# Altium PCB PCB_STM32F411CEU6 BLUE-TOOTH_2023-03-25.pcbdoc (part 1 of 2)
Units mil, origin at the board's own origin, x right, y up, seen from the top; angles counter-clockwise.
Board outline 4590 x 3510 mil, 2 copper layers (Top Layer, Bottom Layer); 160 components, 126 nets, 614 pads, 625 vias.
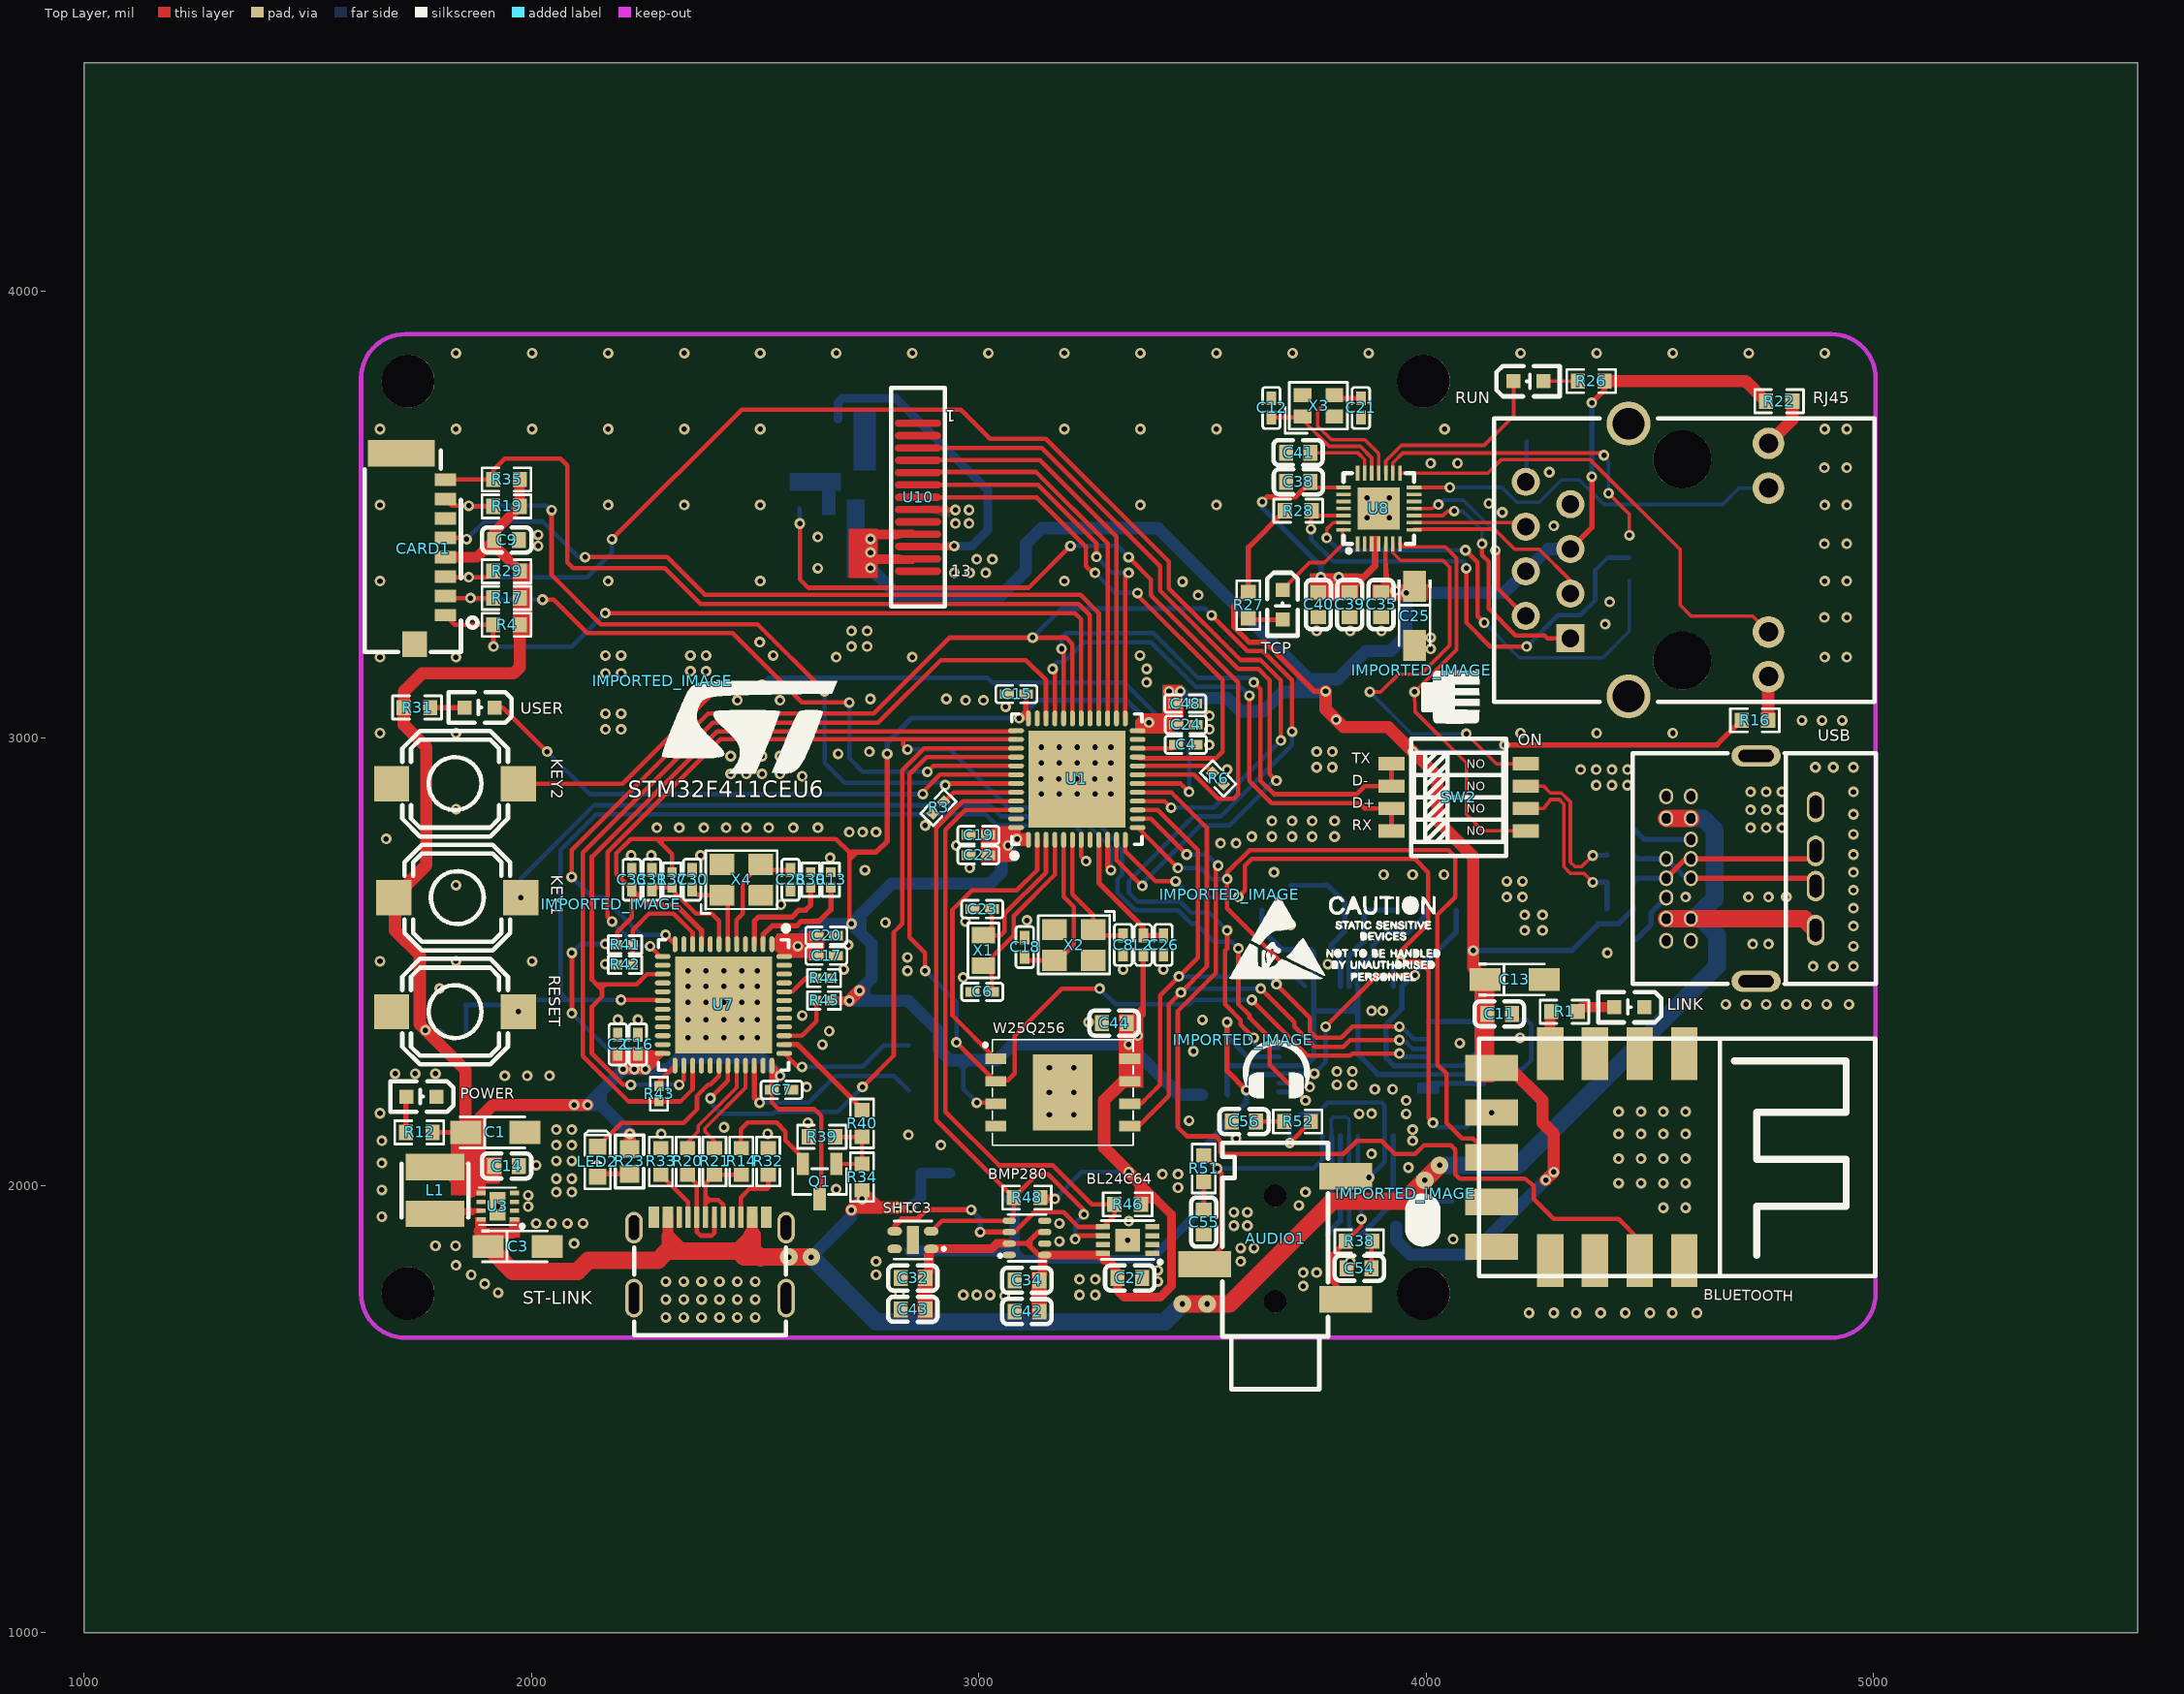
[diagram p0: Top Layer view]
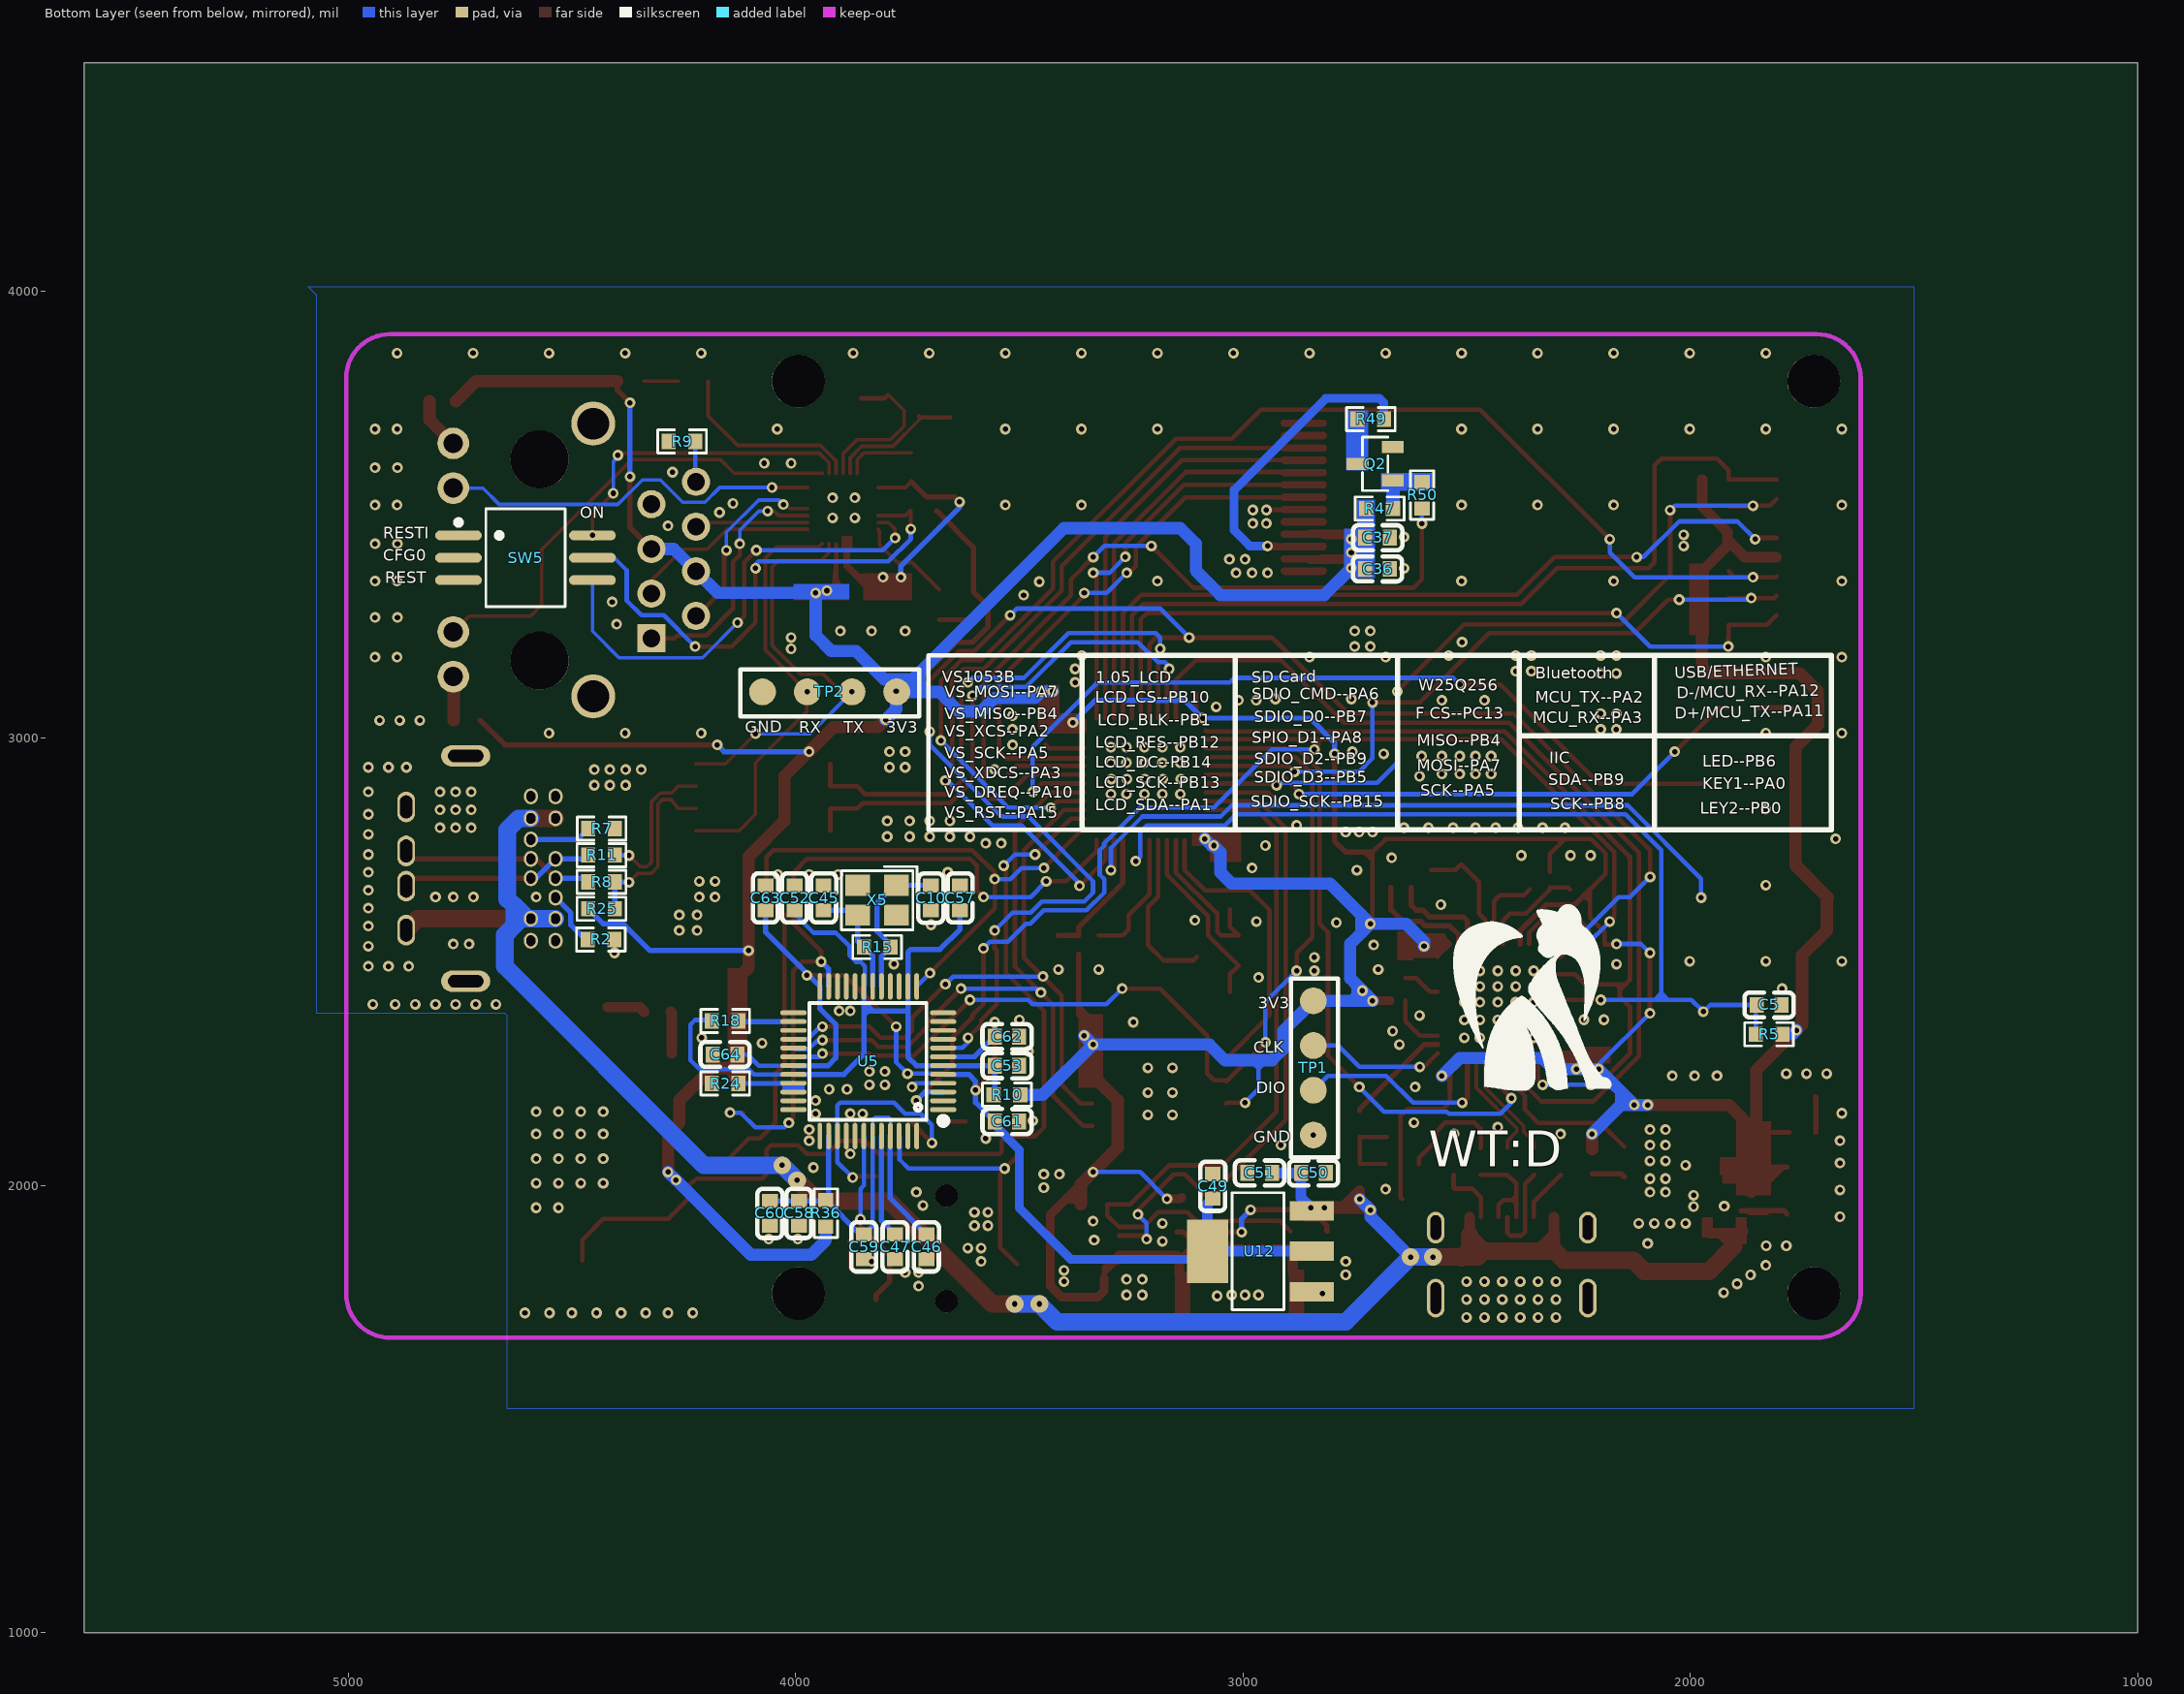
[diagram p1: Bottom Layer view, seen from below]

## Layer stack, top to bottom
Top Layer: signal copper (thickness not stored)
Dielectric: dielectric 12.6, FR-4, Dk 4.8
Bottom Layer: signal copper (thickness not stored)

## Board outline
5590,1000 1000,1000 1000,4510 5590,4510

## Components (designator, comment, footprint, x,y, rotation, side; value= is the part's Value field where it differs from the comment)
AUDIO1 "PJ-320B" AUDIO-SMD_PJ-320B 3662.41,1882.8 r180 top
BL24C64 "BL24C64A-NTRC" UDFN-8L_L2.0-W3.0-P0.50-BL-EP 3332.4,1877.81 r90 top
BLUETOOTH "易微联蓝牙ECBO2S3" 易微联蓝牙ECB02S3 4168.81,1863.6 r270 top
BMP280 "BMP280" SENSOR-TH_BMP280-BL 3107.41,1882.8 r0 top
C1 "22uF" CAP-SMD_L3.2-W1.6-R-RD 1918.81,2118.6 r180 top
C2 "10uF" C0402 2192.57,2315.48 r270 top
C3 "10uF" CAP-SMD_L3.2-W1.6-R-RD 1968.81,1863.6 r180 top
C4 "2.2uF" C0402 3462.57,2985.48 r180 top
C5 "100nF" C0603#1 1823.81,2403.6 r180 bottom
C6 "10pF" C0402 3007.41,2432.8 r180 top
C7 "100nF" C0402_NEW 2558.8,2213.6 r180 top
C8 "15pF" C0402 3322.41,2537.8 r90 top
C9 "100nF" C0603#2 1944.14,3443.6 r180 top
C10 "22pF" C0603#1 3697.41,2642.8 r270 bottom
C11 "100nF" C0603#2 4163.81,2383.6 r0 top
C12 "10pF" C0402 3653.8,3738.6 r270 top
C13 "1uF" CAP-SMD_L3.2-W1.6-R-RD 4197.56,2460.48 r180 top
C14 "100nF" C0603#2 1943.81,2043.6 r180 top
C15 "100nF" C0402_NEW 3083.8,3098.6 r0 top
C16 "100nF" C0402_NEW 2237.57,2315.48 r270 top
C17 "100nF" C0402_NEW 2658.8,2513.6 r180 top
C18 "15pF" C0402 3102.41,2532.8 r270 top
C19 "100nF" C0402_NEW 2998.8,2783.6 r0 top
C20 "100nF" C0402_NEW 2658.8,2558.6 r180 top
C21 "10pF" C0402 3853.8,3738.6 r90 top
C22 "100nF" C0402_NEW 2998.8,2738.6 r0 top
C23 "10pF" C0402 3007.41,2617.8 r180 top
C24 "100nF" C0402_NEW 3462.57,3030.48 r180 top
C25 "2.2uF" CAP-SMD_L3.2-W1.6-RD 3973.8,3273.6 r270 top
C26 "100nF" C0402_NEW 3412.41,2537.8 r270 top
C27 "100nF" C0603#2 3337.4,1792.81 r0 top
C28 "15pF" C0402 2578.8,2683.6 r90 top
C30 "15pF" C0402 2358.8,2683.6 r270 top
C31 "100nF" C0402_NEW 2268.8,2683.6 r270 top
C32 "100nF" C0603#2 2852.41,1792.8 r0 top
C33 "100nF" C0402_NEW 2223.8,2683.6 r270 top
C34 "100nF" C0603#2 3107.41,1787.8 r0 top
C35 "100nF" C0603#2 3898.8,3298.6 r270 top
C36 "4.7uF" C0603#1 2698.8,3378.6 r0 bottom
C37 "100nF" C0603#1 2698.8,3448.6 r180 bottom
C38 "100nF" C0603#2 3713.8,3573.6 r180 top
C39 "100nF" C0603#2 3828.8,3298.6 r270 top
C40 "100nF" C0603#2 3758.8,3298.6 r270 top
C41 "1uF" C0603#2 3713.8,3638.6 r0 top
C42 "10uF" C0603#2 3107.41,1717.8 r0 top
C43 "10uF" C0603#2 2852.41,1722.8 r0 top
C44 "100nF" C0603#2 3302.41,2362.8 r0 top
C45 "22pF" C0603#1 3937.41,2642.8 r90 bottom
C46 "100nF" C0603#1 3707.41,1862.8 r270 bottom
C47 "1uF" C0603#1 3777.41,1862.8 r270 bottom
C48 "10uF" C0402 3461.32,3077.36 r180 top
C49 "100nF" C0603#1 3067.41,1997.8 r90 bottom
C50 "10uF" C0603#1 2842.41,2027.8 r180 bottom
C51 "100nF" C0603#1 2962.41,2027.8 r0 bottom
C52 "100nF" C0603#1 4002.41,2642.8 r90 bottom
C53 "100nF" C0603#1 3527.41,2267.8 r180 bottom
C54 "10nF" C0603#2 3850,1815 r180 top
C55 "10nF" C0603#2 3502.41,1917.8 r270 top
C56 "10nF" C0603#2 3592.41,2142.8 r180 top
C57 "100nF" C0603#1 3632.41,2642.8 r90 bottom
C58 "100nF" C0603#1 3992.41,1937.8 r270 bottom
C59 "100nF" C0603#1 3847.41,1862.8 r270 bottom
C60 "100nF" C0603#1 4057.41,1937.8 r270 bottom
C61 "100nF" C0603#1 3527.41,2142.8 r180 bottom
C62 "100nF" C0603#1 3527.41,2332.8 r180 bottom
C63 "100nF" C0603#1 4067.41,2642.8 r90 bottom
C64 "100nF" C0603#1 4157.4,2292.8 r0 bottom
CARD1 "TF-021B-H265" TF-SMD_TF-021B-H265 1757.77,3423.6 r270 top
IMPORTED_IMAGE "IMPORTED_IMAGE" IMPORTED_IMAGE 2177.21,2628.69 r0 top
IMPORTED_IMAGE "IMPORTED_IMAGE" IMPORTED_IMAGE 3953.03,1981.86 r0 top
IMPORTED_IMAGE "IMPORTED_IMAGE" IMPORTED_IMAGE 3988.57,3151.21 r0 top
IMPORTED_IMAGE "IMPORTED_IMAGE" IMPORTED_IMAGE 2291.67,3128.16 r0 top
IMPORTED_IMAGE "IMPORTED_IMAGE" IMPORTED_IMAGE 3590,2324.9 r0 top
IMPORTED_IMAGE "IMPORTED_IMAGE" IMPORTED_IMAGE 3559.68,2649.62 r0 top
KEY1 "GT-TC129B-H043-L1" SW-SMD_L6.0-W6.0-P6.00-LS8.0 1833.82,2643.55 r180 top
KEY2 "GT-TC129B-H043-L1" SW-SMD_L6.0-W6.0-P6.00-LS8.0 1828.82,2898.55 r180 top
L1 "1uH" IND-SMD_L3.0-W3.0 1783.81,1988.6 r270 top
L2 "600Ω" L0402 3367.41,2537.8 r90 top
LED2 "LED-0603_R" LED0603_RED 2147.41,2052.8 r90 top
LINK "19-213/Y2C-CQ2R2L/3T(CY)" LED0603-R-RD 4453.81,2398.6 r180 top
POWER "19-213/Y2C-CQ2R2L/3T(CY)" LED0603-R-RD 1753.81,2198.6 r180 top
Q1 "SS8050_C2150" SOT-23-3_L2.9-W1.3-P1.90-LS2.4-BR#1 2643.8,2008.6 r90 top
Q2 "SS8050_C2150" SOT-23-3_L2.9-W1.3-P1.90-LS2.4-BR#2 2704.14,3613.6 r0 bottom
R1 "1K" R0603#1 4308.81,2388.6 r180 top
R2 "5.1K" R0603#2 4435,2550 r0 bottom
R3 "10K" R0402 2909.61,2845 r46 top
R4 "10kΩ" R0603#1 1943.81,3253.6 r180 top
R5 "10K" R0603#2 1823.61,2337.8 r180 bottom
R6 "10K" R0402 3534.61,2910 r315 top
R7 "5.1K" R0603#2 4433.6,2797.8 r180 bottom
R8 "22" R0603#2 4433.81,2678.6 r0 bottom
R9 "0Ω" R0603#2 4253.81,3663.6 r0 bottom
R10 "0Ω" R0603#2 3527.41,2202.8 r0 bottom
R11 "22" R0603#2 4433.81,2738.6 r0 bottom
R12 "1K" R0603#1 1748.81,2118.6 r0 top
R13 "10K" R0402 2668.8,2683.6 r90 top
R14 "1.5K" R0603#1 2468.8,2053.6 r270 top
R15 "1MΩ" R0603#2 3817.41,2532.8 r0 bottom
R16 "470Ω" R0603#1 4734.6,3040 r0 top
R17 "10kΩ" R0603#1 1943.81,3313.6 r180 top
R18 "100kΩ" R0603#2 4157.4,2367.8 r180 bottom
R19 "10kΩ" R0603#1 1943.81,3518.6 r0 top
R20 "22" R0603#1 2348.8,2053.6 r90 top
R21 "22" R0603#1 2408.8,2053.6 r90 top
R22 "470Ω" R0603#1 4788.81,3753.6 r0 top
R23 "1k" 0603 2218.8,2053.6 r270 top
R24 "100kΩ" R0603#2 4157.4,2227.8 r180 bottom
R25 "1.5K" R0603#2 4433.81,2618.6 r180 bottom
R26 "1K" R0603#1 4368.81,3798.6 r0 top
R27 "1K" R0603#1 3602.41,3297.8 r90 top
R28 "10kΩ" R0603#1 3713.8,3508.6 r0 top
R29 "10kΩ" R0603#1 1943.81,3373.6 r180 top
R30 "10K" R0402 2623.8,2683.6 r90 top
R31 "1K" R0603#1 1743.81,3068.6 r180 top
R32 "5.1K" R0603#1 2528.8,2053.6 r90 top
R33 "5.1K" R0603#1 2288.8,2053.6 r90 top
R34 "10K" R0603#1 2738.8,2018.6 r270 top
R35 "10kΩ" R0603#1 1943.81,3578.6 r0 top
R36 "10Ω" R0603#2 3932.41,1937.8 r90 bottom
R37 "100K" R0402 2313.8,2683.6 r90 top
R38 "20Ω" R0603#1 3850,1875 r0 top
R39 "36K" R0603#1 2648.8,2108.6 r0 top
R40 "100" R0603#1 2738.8,2138.6 r90 top
R41 "4.7K" R0402 2208.8,2538.6 r0 top
R42 "4.7K" R0402 2208.8,2493.6 r180 top
R43 "100" R0402 2284.61,2205 r270 top
R44 "10K" R0402 2653.8,2463.6 r180 top
R45 "4.7K" R0402 2653.8,2413.6 r180 top
R46 "4.7K" R0603#1 3332.39,1957.81 r180 top
R47 "10K" R0603#2 2694.14,3513.6 r180 bottom
R48 "4.7K" R0603#1 3107.41,1972.8 r180 top
R49 "10Ω" R0603#2 2714.14,3713.6 r0 bottom
R50 "1K" R0603#2 2599.14,3543.6 r270 bottom
R51 "20Ω" R0603#1 3502.41,2037.8 r270 top
R52 "20Ω" R0603#1 3712.41,2142.8 r180 top
RESET "GT-TC129B-H043-L1" SW-SMD_L6.0-W6.0-P6.00-LS8.0 1828.82,2388.55 r180 top
RJ45 "HR911105A_C12074" RJ45-TH_HR911105A 4493.81,3398.55 r90 top
RUN "19-213/Y2C-CQ2R2L/3T(CY)" LED0603-R-RD 4228.81,3798.6 r0 top
SHTC3 "SHTC3" SENSORM-SMD_4P-L2.0-W2.0-P1.00 2852.41,1877.8 r90 top
ST-LINK "GT-USB-7010B" USB-C-SMD_GT-USB-7010B 2398.79,1838.65 r0 top
SW2 "TP-04" SW-SMD_8P-L6.7-W5.4-P1.27-LS8.5 4072.41,2867.8 r270 top
SW5 "DSHP03TS-S" SW-SMD_DSHP03TS-S 4603.81,3403.6 r90 bottom
TCP "19-213/Y2C-CQ2R2L/3T(CY)" LED0603-R-RD 3678.8,3298.6 r270 top
TP1 "TP-SWD-2.54-4P" TP-2.54-4P 2842.41,2412.8 r90 bottom
TP2 "TP-SWD-2.54-4P" TP-2.54-4P 3773.8,3103.6 r180 bottom
U1 "STM32F411CEU6" UFQFPN-48_L7.0-W7.0-P0.50-BL-EP 3218.8,2908.6 r0 top
U3 "TPS62082DSGR" WSON-8_L2.0-W2.0-P0.50-TL-EP 1923.81,1953.6 r180 top
U5 "VS1053B" LQFP-48_L7.0-W7.0-P0.50-LS9.0-BL 3837.41,2277.8 r270 bottom
U7 "STM32F103CBU6" UFQFPN-48_L7.0-W7.0-P0.50-BL-EP 2428.8,2403.6 r180 top
U8 "CH9120" QFN-28_L4.0-W4.0-P0.40-TL-EP2.4 3893.8,3513.6 r90 top
U10 "LCD0.96" LCD0.96 2863.8,3373.6 r90 top
U12 "1117-1.8V" SOT-223-3_L6.5-W3.4-P2.30-LS7.0-BR 2962.41,1852.8 r0 bottom
USB "TYPE-C-31-M-10" USBC-TH_TYPE-C-31-M-10 4703.58,2708.6 r180 top
USER "19-213/Y2C-CQ2R2L/3T(CY)" LED0603-R-RD 1883.81,3068.6 r180 top
W25Q256 "W25Q256JVEIQ" WSON-8_L6.0-W8.0-P1.27-BL-EP 3187.36,2207.84 r270 top
X1 "32.768kHz" FC-12M_L2.0-W1.2 3009.91,2525.3 r270 top
X2 "8MHz" OSC-SMD_4P-L3.2-W2.5-BL 3212.41,2537.8 r180 top
X3 "-" OSC-SMD_4P-L2.0-W1.6-BL 3758.8,3743.6 r0 top
X4 "8MHz" OSC-SMD_4P-L3.2-W2.5-BL 2468.8,2683.6 r0 top
X5 "SX3B12.288F1210F30" CRYSTAL-SMD_4P-L3.2-W2.5-BL 3817.41,2637.8 r180 bottom

## Footprints (in the part's own frame and the unit in brackets; to place one, negate y for a bottom-side part, rotate by r counter-clockwise, add the part's x,y. Pads: shape width x height; smd on the part's side, far side on the other; paste and mask are expansions set on the pad)
0603 [mm]
  rect 1x1.1 smd: 1(-0.7,0) 2(0.7,0)
  silkscreen extent -1.5,-0.8 1.5,0.8
AUDIO-SMD_PJ-320B [mm]
  rect 3x1.5 smd: 1(-4,3.5) 2(4,1.5) 3(-4,-3.5)
  round 1.3 hole 1.3 unplated: ""(0,3.6) ""(0,-2.4)
  silkscreen extent -3,-5.4 3,8.6
C0402 [mm]
  rect 0.79x0.54 smd: 1(-0.545,0) 2(0.545,0)
  silkscreen extent -1.17,-0.5 1.17,0.5
C0402_NEW [mm]
  rect 0.79x0.54 smd: 1(-0.545,0) 2(0.545,0)
  silkscreen extent -1.17,-0.5 1.17,0.5
C0603#1 [mm]
  rect 0.8x0.9 smd: 1(0.7,0) 2(-0.7,0)
  silkscreen extent -1.39,-0.72 1.41,0.71
C0603#2 [mm]
  rect 0.8x0.9 smd: 1(-0.7,0) 2(0.7,0)
  silkscreen extent -1.41,-0.71 1.39,0.72
CAP-SMD_L3.2-W1.6-R-RD [mil]
  rect 69.19x51.02 smd: 1(66.39,0) 2(-66.39,0)
  silkscreen extent -66,-37 81,37
CAP-SMD_L3.2-W1.6-RD [mil]
  rect 69.19x51.02 smd: 1(-66.39,0) 2(66.39,0)
  silkscreen extent -81,-37 66,37
CRYSTAL-SMD_4P-L3.2-W2.5-BL [mm]
  rect 1.4x1.2 smd: 1(1.1,0.85) 2(-1.1,0.85) 3(-1.1,-0.85) 4(1.1,-0.85)
  silkscreen extent -2.03,-1.68 2.26,1.91
FC-12M_L2.0-W1.2 [mm]
  rect 0.925x1.3 smd: 1(-0.863,0) 2(0.863,0)
  silkscreen extent -1.55,-0.88 1.55,0.88
IMPORTED_IMAGE [mil]
IND-SMD_L3.0-W3.0 [mm]
  rect 1.5x3.32 smd: 1(1.328,0) 2(-1.328,0)
  silkscreen extent -1.52,-1.91 1.52,1.91
L0402 [mm]
  rect 0.79x0.54 smd: 1(-0.545,0) 2(0.545,0)
  silkscreen extent -1.17,-0.5 1.17,0.5
LCD0.96 [mm]
  round 0 smd: 1(8.4,0) 2(7.7,0) 3(7,0) 4(6.3,0) 5(5.6,0) 6(4.9,0) 7(4.2,0) 8(3.5,0) 9(2.8,0) 10(2.1,0) 11(1.4,0) 12(0.7,0) 13(0,0)
  Top Layer region: 0.2,1.1 0.2,-1.1 0.199,-1.12 0.196,-1.14 0.191,-1.16 0.184,-1.179 0.175,-1.197 0.164,-1.214 0.152,-1.23 0.138,-1.245 0.122,-1.258 0.106,-1.27 0.088,-1.28 0.069,-1.288 0.05,-1.294 0.03,-1.298 0.01,-1.3 -0.01,-1.3 -0.03,-1.298 -0.05,-1.294 -0.069,-1.288 -0.088,-1.28 -0.106,-1.27 -0.122,-1.258 -0.138,-1.245 -0.152,-1.23 -0.164,-1.214 -0.175,-1.197 -0.184,-1.179 -0.191,-1.16 -0.196,-1.14 -0.199,-1.12 -0.2,-1.1 -0.2,1.1 -0.199,1.12 -0.196,1.14 -0.191,1.16 -0.184,1.179 -0.175,1.197 -0.164,1.214 -0.152,1.23 -0.138,1.245 -0.122,1.258 -0.106,1.27 -0.088,1.28 -0.069,1.288 -0.05,1.294 -0.03,1.298 -0.01,1.3 0.01,1.3 0.03,1.298 0.05,1.294 0.069,1.288 0.088,1.28 0.106,1.27 0.122,1.258 0.138,1.245 0.152,1.23 0.164,1.214 0.175,1.197 0.184,1.179 0.191,1.16 0.196,1.14 0.199,1.12
  Top Layer region: 0.9,1.1 0.9,-1.1 0.899,-1.12 0.896,-1.14 0.891,-1.16 0.884,-1.179 0.875,-1.197 0.864,-1.214 0.852,-1.23 0.838,-1.245 0.822,-1.258 0.806,-1.27 0.788,-1.28 0.769,-1.288 0.75,-1.294 0.73,-1.298 0.71,-1.3 0.69,-1.3 0.67,-1.298 0.65,-1.294 0.631,-1.288 0.612,-1.28 0.594,-1.27 0.578,-1.258 0.562,-1.245 0.548,-1.23 0.536,-1.214 0.525,-1.197 0.516,-1.179 0.509,-1.16 0.504,-1.14 0.501,-1.12 0.5,-1.1 0.5,1.1 0.501,1.12 0.504,1.14 0.509,1.16 0.516,1.179 0.525,1.197 0.536,1.214 0.548,1.23 0.562,1.245 0.578,1.258 0.594,1.27 0.612,1.28 0.631,1.288 0.65,1.294 0.67,1.298 0.69,1.3 0.71,1.3 0.73,1.298 0.75,1.294 0.769,1.288 0.788,1.28 0.806,1.27 0.822,1.258 0.838,1.245 0.852,1.23 0.864,1.214 0.875,1.197 0.884,1.179 0.891,1.16 0.896,1.14 0.899,1.12
  Top Layer region: 1.6,1.1 1.6,-1.1 1.599,-1.12 1.596,-1.14 1.591,-1.16 1.584,-1.179 1.575,-1.197 1.564,-1.214 1.552,-1.23 1.538,-1.245 1.522,-1.258 1.506,-1.27 1.488,-1.28 1.469,-1.288 1.45,-1.294 1.43,-1.298 1.41,-1.3 1.39,-1.3 1.37,-1.298 1.35,-1.294 1.331,-1.288 1.312,-1.28 1.294,-1.27 1.278,-1.258 1.262,-1.245 1.248,-1.23 1.236,-1.214 1.225,-1.197 1.216,-1.179 1.209,-1.16 1.204,-1.14 1.201,-1.12 1.2,-1.1 1.2,1.1 1.201,1.12 1.204,1.14 1.209,1.16 1.216,1.179 1.225,1.197 1.236,1.214 1.248,1.23 1.262,1.245 1.278,1.258 1.294,1.27 1.312,1.28 1.331,1.288 1.35,1.294 1.37,1.298 1.39,1.3 1.41,1.3 1.43,1.298 1.45,1.294 1.469,1.288 1.488,1.28 1.506,1.27 1.522,1.258 1.538,1.245 1.552,1.23 1.564,1.214 1.575,1.197 1.584,1.179 1.591,1.16 1.596,1.14 1.599,1.12
  Top Layer region: 2.3,1.1 2.3,-1.1 2.299,-1.12 2.296,-1.14 2.291,-1.16 2.284,-1.179 2.275,-1.197 2.264,-1.214 2.252,-1.23 2.238,-1.245 2.222,-1.258 2.206,-1.27 2.188,-1.28 2.169,-1.288 2.15,-1.294 2.13,-1.298 2.11,-1.3 2.09,-1.3 2.07,-1.298 2.05,-1.294 2.031,-1.288 2.012,-1.28 1.994,-1.27 1.978,-1.258 1.962,-1.245 1.948,-1.23 1.936,-1.214 1.925,-1.197 1.916,-1.179 1.909,-1.16 1.904,-1.14 1.901,-1.12 1.9,-1.1 1.9,1.1 1.901,1.12 1.904,1.14 1.909,1.16 1.916,1.179 1.925,1.197 1.936,1.214 1.948,1.23 1.962,1.245 1.978,1.258 1.994,1.27 2.012,1.28 2.031,1.288 2.05,1.294 2.07,1.298 2.09,1.3 2.11,1.3 2.13,1.298 2.15,1.294 2.169,1.288 2.188,1.28 2.206,1.27 2.222,1.258 2.238,1.245 2.252,1.23 2.264,1.214 2.275,1.197 2.284,1.179 2.291,1.16 2.296,1.14 2.299,1.12
  Top Layer region: 3,1.1 3,-1.1 2.999,-1.12 2.996,-1.14 2.991,-1.16 2.984,-1.179 2.975,-1.197 2.964,-1.214 2.952,-1.23 2.938,-1.245 2.922,-1.258 2.906,-1.27 2.888,-1.28 2.869,-1.288 2.85,-1.294 2.83,-1.298 2.81,-1.3 2.79,-1.3 2.77,-1.298 2.75,-1.294 2.731,-1.288 2.712,-1.28 2.694,-1.27 2.678,-1.258 2.662,-1.245 2.648,-1.23 2.636,-1.214 2.625,-1.197 2.616,-1.179 2.609,-1.16 2.604,-1.14 2.601,-1.12 2.6,-1.1 2.6,1.1 2.601,1.12 2.604,1.14 2.609,1.16 2.616,1.179 2.625,1.197 2.636,1.214 2.648,1.23 2.662,1.245 2.678,1.258 2.694,1.27 2.712,1.28 2.731,1.288 2.75,1.294 2.77,1.298 2.79,1.3 2.81,1.3 2.83,1.298 2.85,1.294 2.869,1.288 2.888,1.28 2.906,1.27 2.922,1.258 2.938,1.245 2.952,1.23 2.964,1.214 2.975,1.197 2.984,1.179 2.991,1.16 2.996,1.14 2.999,1.12
  Top Layer region: 3.7,1.1 3.7,-1.1 3.699,-1.12 3.696,-1.14 3.691,-1.16 3.684,-1.179 3.675,-1.197 3.664,-1.214 3.652,-1.23 3.638,-1.245 3.622,-1.258 3.606,-1.27 3.588,-1.28 3.569,-1.288 3.55,-1.294 3.53,-1.298 3.51,-1.3 3.49,-1.3 3.47,-1.298 3.45,-1.294 3.431,-1.288 3.412,-1.28 3.394,-1.27 3.378,-1.258 3.362,-1.245 3.348,-1.23 3.336,-1.214 3.325,-1.197 3.316,-1.179 3.309,-1.16 3.304,-1.14 3.301,-1.12 3.3,-1.1 3.3,1.1 3.301,1.12 3.304,1.14 3.309,1.16 3.316,1.179 3.325,1.197 3.336,1.214 3.348,1.23 3.362,1.245 3.378,1.258 3.394,1.27 3.412,1.28 3.431,1.288 3.45,1.294 3.47,1.298 3.49,1.3 3.51,1.3 3.53,1.298 3.55,1.294 3.569,1.288 3.588,1.28 3.606,1.27 3.622,1.258 3.638,1.245 3.652,1.23 3.664,1.214 3.675,1.197 3.684,1.179 3.691,1.16 3.696,1.14 3.699,1.12
  Top Layer region: 4.4,1.1 4.4,-1.1 4.399,-1.12 4.396,-1.14 4.391,-1.16 4.384,-1.179 4.375,-1.197 4.364,-1.214 4.352,-1.23 4.338,-1.245 4.322,-1.258 4.306,-1.27 4.288,-1.28 4.269,-1.288 4.25,-1.294 4.23,-1.298 4.21,-1.3 4.19,-1.3 4.17,-1.298 4.15,-1.294 4.131,-1.288 4.112,-1.28 4.094,-1.27 4.078,-1.258 4.062,-1.245 4.048,-1.23 4.036,-1.214 4.025,-1.197 4.016,-1.179 4.009,-1.16 4.004,-1.14 4.001,-1.12 4,-1.1 4,1.1 4.001,1.12 4.004,1.14 4.009,1.16 4.016,1.179 4.025,1.197 4.036,1.214 4.048,1.23 4.062,1.245 4.078,1.258 4.094,1.27 4.112,1.28 4.131,1.288 4.15,1.294 4.17,1.298 4.19,1.3 4.21,1.3 4.23,1.298 4.25,1.294 4.269,1.288 4.288,1.28 4.306,1.27 4.322,1.258 4.338,1.245 4.352,1.23 4.364,1.214 4.375,1.197 4.384,1.179 4.391,1.16 4.396,1.14 4.399,1.12
  Top Layer region: 5.1,1.1 5.1,-1.1 5.099,-1.12 5.096,-1.14 5.091,-1.16 5.084,-1.179 5.075,-1.197 5.064,-1.214 5.052,-1.23 5.038,-1.245 5.022,-1.258 5.006,-1.27 4.988,-1.28 4.969,-1.288 4.95,-1.294 4.93,-1.298 4.91,-1.3 4.89,-1.3 4.87,-1.298 4.85,-1.294 4.831,-1.288 4.812,-1.28 4.794,-1.27 4.778,-1.258 4.762,-1.245 4.748,-1.23 4.736,-1.214 4.725,-1.197 4.716,-1.179 4.709,-1.16 4.704,-1.14 4.701,-1.12 4.7,-1.1 4.7,1.1 4.701,1.12 4.704,1.14 4.709,1.16 4.716,1.179 4.725,1.197 4.736,1.214 4.748,1.23 4.762,1.245 4.778,1.258 4.794,1.27 4.812,1.28 4.831,1.288 4.85,1.294 4.87,1.298 4.89,1.3 4.91,1.3 4.93,1.298 4.95,1.294 4.969,1.288 4.988,1.28 5.006,1.27 5.022,1.258 5.038,1.245 5.052,1.23 5.064,1.214 5.075,1.197 5.084,1.179 5.091,1.16 5.096,1.14 5.099,1.12
  Top Layer region: 5.8,1.1 5.8,-1.1 5.799,-1.12 5.796,-1.14 5.791,-1.16 5.784,-1.179 5.775,-1.197 5.764,-1.214 5.752,-1.23 5.738,-1.245 5.722,-1.258 5.706,-1.27 5.688,-1.28 5.669,-1.288 5.65,-1.294 5.63,-1.298 5.61,-1.3 5.59,-1.3 5.57,-1.298 5.55,-1.294 5.531,-1.288 5.512,-1.28 5.494,-1.27 5.478,-1.258 5.462,-1.245 5.448,-1.23 5.436,-1.214 5.425,-1.197 5.416,-1.179 5.409,-1.16 5.404,-1.14 5.401,-1.12 5.4,-1.1 5.4,1.1 5.401,1.12 5.404,1.14 5.409,1.16 5.416,1.179 5.425,1.197 5.436,1.214 5.448,1.23 5.462,1.245 5.478,1.258 5.494,1.27 5.512,1.28 5.531,1.288 5.55,1.294 5.57,1.298 5.59,1.3 5.61,1.3 5.63,1.298 5.65,1.294 5.669,1.288 5.688,1.28 5.706,1.27 5.722,1.258 5.738,1.245 5.752,1.23 5.764,1.214 5.775,1.197 5.784,1.179 5.791,1.16 5.796,1.14 5.799,1.12
  Top Layer region: 6.5,1.1 6.5,-1.1 6.499,-1.12 6.496,-1.14 6.491,-1.16 6.484,-1.179 6.475,-1.197 6.464,-1.214 6.452,-1.23 6.438,-1.245 6.422,-1.258 6.406,-1.27 6.388,-1.28 6.369,-1.288 6.35,-1.294 6.33,-1.298 6.31,-1.3 6.29,-1.3 6.27,-1.298 6.25,-1.294 6.231,-1.288 6.212,-1.28 6.194,-1.27 6.178,-1.258 6.162,-1.245 6.148,-1.23 6.136,-1.214 6.125,-1.197 6.116,-1.179 6.109,-1.16 6.104,-1.14 6.101,-1.12 6.1,-1.1 6.1,1.1 6.101,1.12 6.104,1.14 6.109,1.16 6.116,1.179 6.125,1.197 6.136,1.214 6.148,1.23 6.162,1.245 6.178,1.258 6.194,1.27 6.212,1.28 6.231,1.288 6.25,1.294 6.27,1.298 6.29,1.3 6.31,1.3 6.33,1.298 6.35,1.294 6.369,1.288 6.388,1.28 6.406,1.27 6.422,1.258 6.438,1.245 6.452,1.23 6.464,1.214 6.475,1.197 6.484,1.179 6.491,1.16 6.496,1.14 6.499,1.12
  Top Layer region: 8.6,1.1 8.6,-1.1 8.599,-1.12 8.596,-1.14 8.591,-1.16 8.584,-1.179 8.575,-1.197 8.564,-1.214 8.552,-1.23 8.538,-1.245 8.522,-1.258 8.506,-1.27 8.488,-1.28 8.469,-1.288 8.45,-1.294 8.43,-1.298 8.41,-1.3 8.39,-1.3 8.37,-1.298 8.35,-1.294 8.331,-1.288 8.312,-1.28 8.294,-1.27 8.278,-1.258 8.262,-1.245 8.248,-1.23 8.236,-1.214 8.225,-1.197 8.216,-1.179 8.209,-1.16 8.204,-1.14 8.201,-1.12 8.2,-1.1 8.2,1.1 8.201,1.12 8.204,1.14 8.209,1.16 8.216,1.179 8.225,1.197 8.236,1.214 8.248,1.23 8.262,1.245 8.278,1.258 8.294,1.27 8.312,1.28 8.331,1.288 8.35,1.294 8.37,1.298 8.39,1.3 8.41,1.3 8.43,1.298 8.45,1.294 8.469,1.288 8.488,1.28 8.506,1.27 8.522,1.258 8.538,1.245 8.552,1.23 8.564,1.214 8.575,1.197 8.584,1.179 8.591,1.16 8.596,1.14 8.599,1.12
  Top Layer region: 7.9,1.1 7.9,-1.1 7.899,-1.12 7.896,-1.14 7.891,-1.16 7.884,-1.179 7.875,-1.197 7.864,-1.214 7.852,-1.23 7.838,-1.245 7.822,-1.258 7.806,-1.27 7.788,-1.28 7.769,-1.288 7.75,-1.294 7.73,-1.298 7.71,-1.3 7.69,-1.3 7.67,-1.298 7.65,-1.294 7.631,-1.288 7.612,-1.28 7.594,-1.27 7.578,-1.258 7.562,-1.245 7.548,-1.23 7.536,-1.214 7.525,-1.197 7.516,-1.179 7.509,-1.16 7.504,-1.14 7.501,-1.12 7.5,-1.1 7.5,1.1 7.501,1.12 7.504,1.14 7.509,1.16 7.516,1.179 7.525,1.197 7.536,1.214 7.548,1.23 7.562,1.245 7.578,1.258 7.594,1.27 7.612,1.28 7.631,1.288 7.65,1.294 7.67,1.298 7.69,1.3 7.71,1.3 7.73,1.298 7.75,1.294 7.769,1.288 7.788,1.28 7.806,1.27 7.822,1.258 7.838,1.245 7.852,1.23 7.864,1.214 7.875,1.197 7.884,1.179 7.891,1.16 7.896,1.14 7.899,1.12
  Top Layer region: 7.2,1.1 7.2,-1.1 7.199,-1.12 7.196,-1.14 7.191,-1.16 7.184,-1.179 7.175,-1.197 7.164,-1.214 7.152,-1.23 7.138,-1.245 7.122,-1.258 7.106,-1.27 7.088,-1.28 7.069,-1.288 7.05,-1.294 7.03,-1.298 7.01,-1.3 6.99,-1.3 6.97,-1.298 6.95,-1.294 6.931,-1.288 6.912,-1.28 6.894,-1.27 6.878,-1.258 6.862,-1.245 6.848,-1.23 6.836,-1.214 6.825,-1.197 6.816,-1.179 6.809,-1.16 6.804,-1.14 6.801,-1.12 6.8,-1.1 6.8,1.1 6.801,1.12 6.804,1.14 6.809,1.16 6.816,1.179 6.825,1.197 6.836,1.214 6.848,1.23 6.862,1.245 6.878,1.258 6.894,1.27 6.912,1.28 6.931,1.288 6.95,1.294 6.97,1.298 6.99,1.3 7.01,1.3 7.03,1.298 7.05,1.294 7.069,1.288 7.088,1.28 7.106,1.27 7.122,1.258 7.138,1.245 7.152,1.23 7.164,1.214 7.175,1.197 7.184,1.179 7.191,1.16 7.196,1.14 7.199,1.12
  silkscreen extent -2,-1.52 10.41,1.52
LED0603-R-RD [mm]
  rect 0.8x0.8 smd: 1(0.851,0) 2(-0.851,0)
  silkscreen extent -1.82,-0.86 1.77,0.86
LED0603_RED [mm]
  rect 0.9x1 smd: 1(-0.85,0) 2(0.85,0)
  silkscreen extent -1.54,-0.73 1.75,0.73
LQFP-48_L7.0-W7.0-P0.50-LS9.0-BL [mm]
  oval 0.27x1.5 smd: 1(2.75,4.25) 2(2.25,4.25) 3(1.75,4.25) 4(1.25,4.25) 5(0.75,4.25) 6(0.25,4.25) 7(-0.25,4.25) 8(-0.75,4.25) 9(-1.25,4.25) 10(-1.75,4.25) 11(-2.25,4.25) 12(-2.75,4.25) 25(-2.75,-4.25) 26(-2.25,-4.25) 27(-1.75,-4.25) 28(-1.25,-4.25) 29(-0.75,-4.25) 30(-0.25,-4.25) 31(0.25,-4.25) 32(0.75,-4.25) 33(1.25,-4.25) 34(1.75,-4.25) 35(2.25,-4.25) 36(2.75,-4.25)
  oval 1.5x0.27 smd: 13(-4.25,2.75) 14(-4.25,2.25) 15(-4.25,1.75) 16(-4.25,1.25) 17(-4.25,0.75) 18(-4.25,0.25) 19(-4.25,-0.25) 20(-4.25,-0.75) 21(-4.25,-1.25) 22(-4.25,-1.75) 23(-4.25,-2.25) 24(-4.25,-2.75) 37(4.25,-2.75) 38(4.25,-2.25) 39(4.25,-1.75) 40(4.25,-1.25) 41(4.25,-0.75) 42(4.25,-0.25) 43(4.25,0.25) 44(4.25,0.75) 45(4.25,1.25) 46(4.25,1.75) 47(4.25,2.25) 48(4.25,2.75)
  silkscreen extent -3.3,-3.34 3.59,4.46
OSC-SMD_4P-L2.0-W1.6-BL [mm]
  rect 1x0.8 smd: 1(-0.9,-0.6) 2(0.9,-0.6) 3(0.9,0.6) 4(-0.9,0.6)
  silkscreen extent -1.89,-1.56 1.65,1.33
OSC-SMD_4P-L3.2-W2.5-BL [mm]
  rect 1.4x1.2 smd: 1(-1.1,-0.875) 2(1.1,-0.875) 3(1.1,0.875) 4(-1.1,0.875)
  silkscreen extent -2.29,-1.9 2.03,1.65
QFN-28_L4.0-W4.0-P0.40-TL-EP2.4 [mm]
  rect 0.85x0.2 smd: 1(-2,1.2) 2(-2,0.8) 3(-2,0.4) 4(-2,0.001) 5(-2,-0.4) 6(-2,-0.8) 7(-2,-1.2) 15(2,-1.2) 16(2,-0.8) 17(2,-0.4) 18(2,0) 19(2,0.4) 20(2,0.8) 21(2,1.2)
  rect 0.2x0.85 smd: 8(-1.2,-2) 9(-0.8,-2) 10(-0.4,-2) 11(0,-2) 12(0.399,-2) 13(0.8,-2) 14(1.2,-2) 22(1.2,2) 23(0.8,2) 24(0.4,2) 25(0,2) 26(-0.4,2) 27(-0.8,2) 28(-1.2,2)
  rect 2.4x2.4 smd: 29(0,0)
  silkscreen extent -2.5,-2 2,2
R0402 [mm]
  rect 0.566x0.54 smd: 1(-0.433,0) 2(0.433,0)
  silkscreen extent -0.94,-0.5 0.94,0.5
R0603#1 [mil]
  rect 31.75x34.02 smd: 1(-29.65,0) 2(29.66,0)
  silkscreen extent -55,-26 55,26
R0603#2 [mil]
  rect 31.75x34.02 smd: 1(29.65,0) 2(-29.65,0)
  silkscreen extent -55,-26 55,26
RJ45-TH_HR911105A [mm]
  rect 1.6x1.6 hole 1: 1(-4.45,4.355)
  round 1.6 hole 1: 2(-3.18,6.895) 3(-1.91,4.355) 4(-0.64,6.895) 5(0.63,4.355) 6(1.9,6.895) 7(3.17,4.355) 8(4.44,6.895)
  round 1.8 hole 1.1: 9(-6.625,-6.895) 10(-4.085,-6.895) 11(4.085,-6.895) 12(6.625,-6.895)
  round 2.5 hole 1.8: SH1(-7.745,1.055) SH2(7.745,1.055)
  round 3.3 hole 3.3 unplated: ""(-5.715,-1.995) ""(5.715,-1.995)
  silkscreen extent -8.05,-12.92 8.05,8.68
SENSOR-TH_BMP280-BL [mm]
  oval 0.767x0.364 smd: 1(-1.008,-0.975) 2(-1.008,-0.325) 3(-1.008,0.325) 4(-1.008,0.975) 5(1.009,0.975) 6(1.009,0.325) 7(1.009,-0.325) 8(1.009,-0.975)
  silkscreen extent -1.61,-1.33 1.08,1.33
SENSORM-SMD_4P-L2.0-W2.0-P1.00 [mm]
  oval 0.49x0.83 smd: 1(-0.5,-1.04) 2(0.5,-1.04) 3(0.5,1.04) 4(-0.5,1.04)
  rect 1.6x0.7 smd: 5(0,0)
  silkscreen extent -1.08,-1.84 1.08,1.08
SOT-23-3_L2.9-W1.3-P1.90-LS2.4-BR#1 [mm]
  rect 1.25x0.7 smd: 1(1,-0.95) 2(1,0.95) 3(-1,0)
  silkscreen extent -0.73,-1.53 0.73,1.53
SOT-23-3_L2.9-W1.3-P1.90-LS2.4-BR#2 [mm]
  rect 1.25x0.7 smd: 1(-1,0.95) 2(-1,-0.95) 3(1,0)
  silkscreen extent -0.73,-1.53 0.73,1.53
SOT-223-3_L6.5-W3.4-P2.30-LS7.0-BR [mm]
  rect 2.5x1.1 smd: 1(-2.97,2.3) 2(-2.97,0) 3(-2.97,-2.3)
  rect 2.34x3.6 smd: 4(2.97,0)
  silkscreen extent -1.37,-3.33 1.57,3.33
SW-SMD_8P-L6.7-W5.4-P1.27-LS8.5 [mil]
  rect 30x59.05 smd: 1(-75,-150) 2(-25,-150) 3(25,-150) 4(75,-150) 5(75,150) 6(25,150) 7(-25,150) 8(-75,150)
  silkscreen extent -131,-106 131,106
SW-SMD_DSHP03TS-S [mm]
  oval 0.56x2.655 smd: 1(1.27,3.802) 2(0,3.802) 3(-1.27,3.802) 4(-1.27,-3.803) 5(0,-3.803) 6(1.27,-3.803)
  silkscreen extent -2.78,-2.25 2.78,3.95
SW-SMD_L6.0-W6.0-P6.00-LS8.0 [mm]
  rect 2x2 smd: 1(-3.601,0) 2(3.601,0)
  silkscreen extent -3,-3 3,3
TF-SMD_TF-021B-H265 [mm]
  rect 0.7x1.2 smd: 1(3.775,1.25) 2(2.675,1.25) 3(1.575,1.25) 4(0.475,1.25) 5(-0.625,1.25) 6(-1.725,1.25) 7(-2.825,1.25) 8(-3.925,1.25)
  rect 1.5x3.8 smd: 9(-5.425,-1.25)
  rect 1.45x1.4 smd: 10(5.425,-0.5)
  silkscreen extent -5.58,-3.32 5.85,3.08
TP-2.54-4P [mil]
  round 60 smd: 1(0,0) 2(-100,0) 3(-200,0) 4(-300,0)
  silkscreen extent -350,-55 50,50
UDFN-8L_L2.0-W3.0-P0.50-BL-EP [mm]
  rect 0.3x0.8 smd: 1(-0.75,-1.4) 2(-0.25,-1.4) 3(0.25,-1.4) 4(0.75,-1.4) 5(0.75,1.4) 6(0.25,1.4) 7(-0.25,1.4) 8(-0.75,1.4)
  rect 1.3x1.4 smd: 9(0,0)
  silkscreen extent -1.35,-1.95 1.1,1.5
UFQFPN-48_L7.0-W7.0-P0.50-BL-EP [mm]
  oval 0.28x0.9 smd: 1(-2.751,-3.449) 2(-2.25,-3.449) 3(-1.75,-3.449) 4(-1.25,-3.449) 5(-0.749,-3.449) 6(-0.249,-3.449) 7(0.249,-3.449) 8(0.749,-3.449) 9(1.25,-3.449) 10(1.75,-3.449) 11(2.251,-3.449) 12(2.751,-3.449) 25(2.751,3.449) 26(2.251,3.449) 27(1.75,3.449) 28(1.25,3.449) 29(0.749,3.449) 30(0.249,3.449) 31(-0.249,3.449) 32(-0.749,3.449) 33(-1.25,3.449) 34(-1.75,3.449) 35(-2.25,3.449) 36(-2.751,3.449)
  oval 0.9x0.28 smd: 13(3.449,-2.751) 14(3.449,-2.25) 15(3.449,-1.75) 16(3.449,-1.25) 17(3.449,-0.749) 18(3.449,-0.249) 19(3.449,0.249) 20(3.449,0.749) 21(3.449,1.25) 22(3.449,1.75) 23(3.449,2.25) 24(3.449,2.751) 37(-3.449,2.751) 38(-3.449,2.25) 39(-3.449,1.75) 40(-3.449,1.25) 41(-3.449,0.749) 42(-3.449,0.249) 43(-3.449,-0.249) 44(-3.449,-0.749) 45(-3.449,-1.25) 46(-3.449,-1.75) 47(-3.449,-2.25) 48(-3.449,-2.751)
  rect 5.5x5.5 smd: 49(0,0)
  silkscreen extent -3.7,-4.5 3.7,3.7
USB-C-SMD_GT-USB-7010B [mm]
  rect 0.6x1.2 smd: 1(-3.2,2.3) 2(-2.4,2.3) 11(2.4,2.3) 12(3.2,2.3)
  rect 0.3x1.2 smd: 3(-1.75,2.3) 4(-1.25,2.3) 5(-0.75,2.3) 6(-0.25,2.3) 7(0.25,2.3) 8(0.75,2.3) 9(1.25,2.3) 10(1.75,2.3)
  oval 1x1.8 hole 0.6 slot 1.4 at 90 deg: 13(-4.32,1.7) 14(4.32,1.7)
  oval 1x2.2 hole 0.6 slot 1.8 at 90 deg: 15(-4.32,-2.3) 16(4.32,-2.3)
  silkscreen extent -4.3,-4.4 4.3,0.57
USBC-TH_TYPE-C-31-M-10 [mm]
  oval 0.8x0.9 hole 0.5 slot 0.6 at 90 deg: 1(4.24,4.1) 2(4.24,2.85) 3(4.24,1.65) 4(4.24,0.55) 5(4.24,-0.55) 7(4.24,-2.85) 8(4.24,-4.1) 9(2.84,-4.1) 10(2.84,-2.85) 11(2.84,-1.65) 12(2.84,-0.55) 13(2.84,0.55) 15(2.84,2.85) 16(2.84,4.1)
  oval 1x1.75 hole 0.7 slot 1.3 at 90 deg: 17(-4.24,3.5) 18(-4.24,1) 19(-4.24,-1) 20(-4.24,-3.5)
  oval 2.8x1.2 hole 0.7 slot 2 at 0 deg: 21(-0.86,6.4) 21(-0.86,-6.4)
  silkscreen extent -7.66,-6.55 6.14,6.55
WSON-8_L2.0-W2.0-P0.50-TL-EP [mm]
  rect 0.521x0.25 smd: 1(-0.95,0.75) 2(-0.95,0.25) 3(-0.95,-0.25) 4(-0.95,-0.75) 5(0.95,-0.75) 6(0.95,-0.25) 7(0.95,0.25) 8(0.95,0.75)
  rect 0.902x1.613 smd: 9(0,0.013)
  silkscreen extent -1.47,-1.06 1.06,1.22
WSON-8_L6.0-W8.0-P1.27-BL-EP [mm]
  rect 0.6x1.2 smd: 1(-1.905,-3.8) 2(-0.635,-3.799) 3(0.635,-3.799) 4(1.905,-3.8) 5(1.905,3.8) 6(0.635,3.8) 7(-0.635,3.8) 8(-1.905,3.8)
  rect 4.3x3.4 smd: 9(0,0)
  silkscreen extent -3,-4.5 3,4
易微联蓝牙ECB02S3 [mm]
  rect 3x1.5 smd: 1(-10.958,10.369) 2(-10.958,7.829) 3(-10.958,5.289) 4(-10.958,2.749) 10(0.798,2.749) 11(0.798,5.289) 12(0.798,7.829) 13(0.798,10.369)
  rect 1.5x3 smd: 5(-10.141,-0.565) 6(-7.601,-0.565) 7(-5.061,-0.565) 8(-2.521,-0.565) 9(0.019,-0.565)
  silkscreen extent -11.81,-1.29 1.69,21.21

## Free pads (board coordinates)
  round 118.11 hole 118.11 unplated: ""(1723.81,1758.6) ""(1723.81,3798.6) ""(3993.8,1758.6) ""(3993.8,3798.6)

## Via types
v1: diameter 24.02, hole 12, Top Layer to Bottom Layer, tented both sides, 546 vias
v2: diameter 24.02, hole 12.01, Top Layer to Bottom Layer, tented both sides, 73 vias
v3: diameter 39.37, hole 12, Top Layer to Bottom Layer, tented both sides, 6 vias

## Nets (pads, with @x,y where several pads share a name; then routed paths per layer and width w, separated by ;. In a path a pad name is that pad's centre, name@x,y a point inside that pad or via, vN(x,y) a via of type N, cw(c..) or ccw(c..) an arc to the next point about the centre after c; other vN are vias at no path point)
3V3: BL24C64.8 BLUETOOTH.5 BMP280.2 BMP280.6 BMP280.8 C1.1 C2.2 C7.2 C9.2 C11.1 C13.1 C14.2 C15.2 C16.2 C17.2 C19.2 C20.2 C22.2 C24.2 C25.1 C27.1 C32.2 C33.2 C34.2 C35.1 C36.1 C37.2 C42.2 C43.2 C44.2 C48.2 CARD1.4 KEY1.2 L1.2 L2.1 Q1.3 R4.1 R5.1 R10.2 R12.2 R16.1 R17.1 R19.2 R22.1 R23.1 R25.2 R26.2 R27.2 R28.1 R29.1 R31.2 R35.2 R36.2 R37.2 R41.1 R45.1 R46.1 R47.2 R48.1 RJ45.4 RJ45.5 SHTC3.1 TP1.1 TP2.1 U1.1 U1.24 U1.36 U1.48 U3.5 U7.1 U7.9 U7.24 U7.36 U7.48 U8.5 U10.10 U10.12 W25Q256.3 W25Q256.7 W25Q256.8 | length 19715.7
  Top Layer w8: C35.1@3898.8,3326.16 3909.55,3336.91 U8.5@3909.56,3434.86
  Top Layer w10: v1(2090.01,2385) v1(2090.01,2520) ; v1(2164.61,2540) 2166.01,2538.6 R41.1@2191.76,2538.6 2191.76,2566.76 2223.8,2598.8 2223.8,2643.74 2230.73,2643.74 2223.8,2650.67 C33.2@2223.8,2662.14 2189.61,2696.34 2189.61,2742.7 2221.91,2775 2279.61,2775 2313.8,2740.8 R37.2@2313.8,2700.64 ; 2223.8,2637.47 2225.36,2637.47 2236.9,2649 ; 2230.7,2643.7 2242.11,2643.8 ; 2264.44,2775 2680,2775 2710,2745 2710,2590 v1(2715.01,2585) ; 2291.06,2763.55 2291.06,2770.12 2295.94,2775 ; C7.2@2537.35,2213.6 2537.34,2185.7 2552.57,2170.48 2632.57,2170.48 2647.57,2155.48 2647.57,1972.99 Q1.3@2643.8,1969.23 ; C17.2@2637.35,2513.6 2566.3,2513.6 U7.48@2564.6,2511.9 U7.1@2537.1,2539.41 2556.3,2558.6 C20.2@2637.35,2558.6 ; 2710,2727.52 2727.48,2745 2734.16,2745 ; v1(2995.01,2185) 3035.61,2185 W25Q256.3@3037.78,2182.84 ; R26.2@4398.46,3798.6 4714.15,3798.6 R22.1@4759.15,3753.6
  Top Layer w11.81: R12.2@1778.46,2118.6 C1.1@1852.42,2118.6 ; L1.2@1783.81,2040.88 1828.65,2040.88 U3.5@1886.4,1983.13 ; C33.2@2223.8,2662.14 2258.11,2627.8 2322.41,2627.8 2379.61,2570.6 U7.9@2379.6,2539.41 ; C16.2@2237.57,2294.02 2238.84,2295.3 U7.24@2293,2295.3 ; 2537.18,2247.93 2552.07,2247.93 v1(2555.01,2245) ; 2537.23,2234.86 2547.36,2245 v1(2555.01,2245) ; C7.2@2537.35,2213.6 U7.36@2537.1,2267.81 ; 2710,2745 2770,2745 2795,2770 v1(2795.01,2965) ; 2747.61,3400.5 U10.12@2863.8,3401.16 ; BMP280.2@3067.71,1870 3107.61,1870.5 ; 3105.26,3065.36 3105.26,3060.26 v1(3090.01,3045) U1.36@3110.51,3044.39 3105.26,3049.64 C15.2@3105.26,3098.6 ; 3114.2,1877.1 3114.91,1863.2 ; BMP280.6@3147.12,1895.59 3132.7,1895.6 3107.61,1870.5 ; C44.2@3329.96,2362.8 3367.41,2400.2 L2.1@3367.41,2516.34 ; 3359.91,2392.7 3360.01,2375 3367.41,2382.41 3367.41,2406.68 ; 3410.49,3050.48 3437.37,3077.36 C48.2@3439.87,3077.36 ; 3422.57,3040.48 3367.57,3040.48 3354.61,3027.52 U1.24@3354.61,3016.9 ; 3422.57,3050.48 3367.57,3050.48 3354.61,3037.52 U1.24@3354.61,3016.9 ; R27.2@3602.41,3327.45 3602.41,3426.86 R28.1@3684.14,3508.6 ; R27.2@3602.41,3327.45 3570.01,3295.1 3570.01,3249 3604.01,3215 3640.01,3215 3750.01,3105 v1(3775.01,3105) ; v1(4175.01,2985) 4649.94,2985 R16.1@4704.94,3040 ; RJ45.5@4322.35,3423.36 4370.01,3471 v1(4370.01,3585) ; v1(4370.01,3750) 4398.47,3778.47 R26.2@4398.46,3798.6 ; U7.36@2537.1,2267.81 v1@2555,2249.91 ; U7.36@2537.1,2267.81 v1@2555,2249.91 ; v1(2555.01,2245) v1@2555,2249.91 ; v1(2555.01,2245) v1@2555,2249.91 ; 3107.61,1870.5 3133.7,1844.4 BMP280.8@3147.12,1844.41 ; 3137.57,1825.48 3137.57,1834.84 BMP280.8@3147.12,1844.41 ; 3137.57,1825.48 3137.57,1790.39 C34.2@3134.97,1787.8 3147.12,1799.95 BMP280.8@3147.12,1844.41 ; 3137.57,1825.48 3147.12,1835.04 BMP280.8@3147.12,1844.41 ; U1.24@3354.61,3016.9 3358.18,3020.48 3407.57,3020.48 ; U1.24@3354.61,3016.9 3368.18,3030.48 C24.2@3441.11,3030.48 ; 3407.57,3020.48 3431.11,3020.48 C24.2@3441.11,3030.48 ; 3407.57,3020.48 3417.57,3030.48 C24.2@3441.11,3030.48 ; C32.2@2879.96,1792.8 2882.57,1795.4 2882.57,1845.48 2893.36,1856.27 SHTC3.1@2893.35,1858.11 2893.36,1806.19 C32.2@2879.96,1792.8 ; 3272.57,1840.48 3272.57,1843.56 BL24C64.8@3277.28,1848.28 3309.84,1815.72 C27.1@3309.84,1792.81 3309.84,1803.2 3272.57,1840.48
  Top Layer w15.75: v1(2757.57,3415.48) 2771.89,3401.16 U10.12@2863.8,3401.16 ; v1@2762.61,3455.5 U10.10@2863.8,3456.28
  Top Layer w19.68: R45.1@2670.84,2413.6 v1(2710.01,2412.8) ; SHTC3.1@2893.35,1858.11 3028.11,1858.11 3040,1870 BMP280.2@3067.71,1870 ; R48.1@3137.06,1972.8 3139.86,1970 v1(3169.61,1970) ; BMP280.8@3147.12,1844.41 3268.64,1844.4 3280.2,1832.84 ; C27.1@3309.84,1792.81 3310.01,1765 3325.01,1750 3405.01,1750 3430.01,1775 3430.01,1935 v1(3335.01,2030) ; R46.1@3362.05,1957.81 3373.76,1969.52 3395.49,1969.52
  Top Layer w23.62: CARD1.4@1806.99,3404.9 1877.88,3404.9 C9.2@1916.59,3443.6 ; R29.1@1973.46,3373.6 1916.59,3430.48 C9.2@1916.59,3443.6 ; R35.2@1973.46,3578.6 R19.2@1973.46,3518.6 1916.59,3461.72 C9.2@1916.59,3443.6 ; C2.2@2192.57,2294.02 2204.61,2281.98 v1(2204.61,2260) v1(2254.61,2260) ; 2214.61,2295 2218.7,2290.91 v1@2218.7,2260 ; v1(2229.61,2260) 2229.61,2286.06 C16.2@2237.57,2294.02 ; v1@2241.59,2260 2241.59,2289.99 C16.2@2237.57,2294.02 ; 2269.61,2285 2269.61,2275 v1(2254.61,2260) ; C16.2@2237.57,2294.02 2254.61,2276.98 v1(2254.61,2260)
  Top Layer w27.56: R31.2@1714.11,3068.6 1714.61,3105 1754.61,3145 1959.61,3145 1973.51,3158.9 R4.1@1973.46,3253.6 ; R31.2@1714.14,3068.6 1714.14,3030.46 1764.61,2980 1764.61,2716.09 KEY1.2@1692.06,2643.55 1694.61,2640.99 1694.61,2570 1749.61,2515 1749.61,2360 v1(1762.46,2347.14) 1852.41,2257.19 C1.1@1852.42,2118.6 1913.81,2180 v1(2095.01,2180) v1(2125.01,2180) ; R23.1@2218.8,2081.16 v1(2219.61,2115) ; v1(2710.01,2412.8) v1(2732.7,2435.5) ; W25Q256.7@3336.98,2232.84 3322.83,2232.83 3280,2190 3280,2085 3362.05,2002.94 R46.1@3362.05,1957.81 ; v1(3775.01,3105) 3775,3065 3798.65,3041.35 3815,3025 3915,3025 4025,2915 4025,2815 4105,2735 4105,2486.66 C13.1@4131.18,2460.48 ; BLUETOOTH.5@4146.56,2262.85 4187.15,2262.85 4260.01,2190 4260.01,2140 4285.01,2115 v1(4285.01,2030) v1(4267.1,2012.09) ; R26.2@4398.46,3798.6 4714.15,3798.6 R22.1@4759.15,3753.6
  Bottom Layer w10: v1(2090.01,2385) 2204.61,2270.39 v1(2204.61,2260) ; v1(2090.01,2520) 2110,2540 v1(2164.61,2540) ; 2949.82,2280 2949.82,2275.76 2964.64,2260.95 ; 2964.64,2262.43 2978.34,2276.13 2978.34,2280 ; 2964.64,2280 2964.64,2215.36 v1(2995.01,2185) ; v1(3169.61,1970) 3229.61,2030 v1(3335.01,2030)
  Bottom Layer w11.81: v1(2795.01,2965) 2795,2990 2850,3045 v1(3090.01,3045) 3130.01,3085 3305.01,3085 3330.01,3085 v1(3380.01,3035) ; v1(3970.01,2970) 4160,2970 v1(4175.01,2985) ; v1(4105.01,2525) 4325,2525 4385,2585 4429.86,2585 R25.2@4463.46,2618.6 ; v1(4370.01,3585) v1(4370.01,3750)
  Bottom Layer w19.68: v1(2710.01,2412.8) TP1.1@2842.41,2412.8
  Bottom Layer w27.56: v1(1762.46,2347.14) 1771.81,2337.8 R5.1@1793.94,2337.8 ; v1(2095.01,2180) v1(2125.01,2180) ; 2153.91,2209.3 2154.61,2180 ; v1(2219.61,2115) 2154.61,2180 ; v1(2229.61,2260) v1(2204.61,2260) ; v1(2555.01,2245) 2515,2285 2330,2285 2305,2260 v1(2254.61,2260) v1(2204.61,2260) ; v1(2595.01,2535) 2595.01,2545 2635.01,2585 v1(2715.01,2585) ; 2734.91,2604.9 2735.01,2565 v1(2715.01,2585) ; 2749.25,2412.8 2749.25,2418.96 ; v1(2757.57,3415.48) v1(2757.57,3380.48) ; v1(2757.57,3445.48) v1(2757.57,3380.48) ; 2760.01,2477.78 2760.01,2462.8 ; 2879.72,2375.48 TP1.1@2842.41,2412.8 ; v1(3085.01,2775) 3070,2760 v1(3065.01,2760) 3050.01,2745 3050.01,2700 3025.01,2675 2805.01,2675 v1(2715.01,2585) ; v1(3355.01,2335) v1(3335.01,2315) ; v1(3425.01,3105) v1(3450.01,3105) 3465,3090 3555,3090 3585,3060 3635,3060 3678.6,3103.6 TP2.1@3773.8,3103.6 ; R10.2@3497.74,2202.8 3447.2,2202.8 v1(3335.01,2315) ; 3712.41,3103.6 3712.41,3112.07 3735.17,3134.83 3738.47,3131.53 3801.53,3131.53 3865,3195 3920,3195 3955,3230 v1(3955.01,3325) 4174.01,3325 RJ45.4@4222.35,3373.36 4272.35,3423.35 RJ45.5@4322.35,3423.36 ; 3722.3,3147.7 3722.41,3122.1 ; v1@3798.65,3041.35 3775,3065 3775,3102.41 TP2.1@3773.8,3103.6 ; R36.2@3932.41,1908.14 3932.41,1877.6 3965.01,1845 4100.01,1845 v1(4267.1,2012.09) v1(4285.01,2030) ; v1(2125.01,2180) 2154.61,2180 ; v1(2125.01,2180) 2125.01,2180.4 v1(2204.61,2260) ; v1(2715.01,2585) 2760.01,2540 2760.01,2462.8 ; v1(2732.7,2435.5) 2760.01,2462.8 ; v1(2732.7,2435.5) 2749.25,2418.96 ; v1(2732.7,2435.5) v1(2710.01,2412.8) TP1.1@2842.41,2412.8 ; 2749.25,2418.96 2744.19,2424.01 2744.19,2446.99 2760.01,2462.8 ; v1(2757.57,3380.48) 2818.05,3320 3050,3320 3105,3375 3105,3435 3140,3470 3400,3470 3766.4,3103.6 TP2.1@3773.8,3103.6 ; TP1.1@2842.41,2412.8 2910,2345.2 2910,2305 2935,2280 3040,2280 3075,2315 v1(3335.01,2315)
  other v1: 3798.66,3041.35 3775.01,3105 3930.01,3330
ACT: RJ45.11 U8.14 | length 865
  Top Layer w8: U8.14@3972.55,3560.83 v1(4052.86,3560.83)
  Bottom Layer w8: v1(4052.86,3560.83) 4169.38,3560.83 4202.4,3527.8 4252.4,3527.8 4302.4,3577.8 4342.4,3577.8 4397.4,3522.8 4662.4,3522.8 4698.98,3559.38 RJ45.11@4765.26,3559.39
AVDD: C46.2 C58.2 C59.2 C60.2 R36.1 U5.38 U5.43 U5.45 | length 1109.2
  Bottom Layer w8: U5.45@3788.2,2110.48 3787.41,2147.8 3792.41,2152.8 3822.41,2152.8 3827.61,2147.6 U5.43@3827.57,2110.48 ; 3827.57,1990.48 U5.43@3827.57,2110.48
  Bottom Layer w10: U5.43@3827.57,2110.48 3827.57,1910.2 C59.2@3847.41,1890.36
  Bottom Layer w11.81: C46.2@3707.41,1890.36 3788.2,1971.15 U5.45@3788.2,2110.48 ; C59.2@3847.41,1890.36 3855.3,1890.4 R36.1@3932.41,1967.45 ; U5.38@3925.99,2110.48 3925.99,1973.88 R36.1@3932.41,1967.45 3934.51,1965.36 C60.2@4057.41,1965.36
BLK: R50.1 U1.19 | length 1833.4
  Top Layer w10: v1(2599.61,3480) 2599.61,3355 2618,3336.5 3111.11,3336.5 v1(3204.61,3430) ; v1(3334.61,3405) 3384.61,3355 3384.61,3320 3579.61,3125 3579.61,2875 3569.61,2865 3534.61,2865 3481.2,2918.4 U1.19@3354.61,2918.4
  Bottom Layer w10: R50.1@2599.14,3513.95 v1(2599.61,3480) ; v1(3204.61,3430) 3309.61,3430 v1(3334.61,3405)
BT_M/S: BLUETOOTH.12 U1.14 | length 2135.9
  Top Layer w10: U1.14@3354.61,2820 3384.61,2820 v1(3464.61,2740) ; v1(3534.61,2715) 3529.61,2715 3529.61,2475 3444.61,2390 3444.61,2130 3464.61,2110 3529.61,2110 3539.61,2100 3539.61,2075 3544.61,2070 3815.01,2070 3845.01,2100 3900.01,2100 3930.01,2070 3975.01,2070 3995.01,2090 4055.01,2090 4065.01,2080 4065.01,2025 4075.01,2015 4220.01,2015 4240.01,2000 4240.01,1970 4285.01,1925 4430.01,1925 4477.01,1878 BLUETOOTH.12@4477.03,1832.18
  Bottom Layer w10: v1(3464.61,2740) 3509.61,2740 v1(3534.61,2715)
C54_1: C54.1 R38.2 | length 60.9
  Top Layer w10: C54.1@3877.55,1815 3877.57,1872.9 R38.2@3879.66,1875
C55_1: C55.1 R51.2 | length 62.8
  Top Layer w10: C55.1@3502.41,1945.36 R51.2@3502.41,2008.14
C56_1: C56.1 R52.2 | length 62.8
  Top Layer w10: C56.1@3619.96,2142.8 R52.2@3682.74,2142.8
CFG0: R28.2 SW5.5 U8.26 | length 1148.8
  Top Layer w8: v1(3742.41,3467.8) 3742.41,3507.54 R28.2@3743.46,3508.6 3754.2,3497.86 U8.26@3815.07,3497.85
  Top Layer w10: v1(4089.61,3380) 4089.61,3258.44 4143.05,3205 v1(4224.6,3205)
  Bottom Layer w10: v1(3742.41,3467.8) 3742.4,3445.64 3792.57,3395.48 4082.57,3395.48 4089.61,3388.44 v1(4089.61,3380) ; v1(4224.6,3205) 4294.6,3275 4344.6,3275 4377.56,3307.96 4377.56,3375.48 4405.69,3403.6 SW5.5@4454.1,3403.6
CVDD: C49.2 C61.2 C62.2 C63.2 C64.2 U5.5 U5.7 U5.24 U5.31 U12.2 U12.4 | length 2645.5
  Top Layer w10: v1(3775.01,2355) 3890.01,2470 v1(3974.61,2470)
  Top Layer w11.81: v1(3554.61,2365) 3554.61,2255.81 v1(3597.41,2213.01)
  Bottom Layer w10: U5.5@3670.09,2248.27 3671.82,2250 v1(3749.61,2250) 3775.01,2275.4 v1(3775.01,2355) ; U5.31@4004.72,2267.96 4082.57,2267.96 4107.4,2292.8 C64.2@4129.85,2292.8
  Bottom Layer w11.81: v1(3554.61,2365) C62.2@3554.96,2332.8 ; C61.2@3554.96,2142.8 3597.41,2185.24 v1(3597.41,2213.01) 3597.41,2232.8 3612.88,2248.27 U5.5@3670.09,2248.27 ; C62.2@3554.96,2332.8 3600.12,2287.64 U5.7@3670.09,2287.64 ; U5.31@4004.72,2267.96 3927.01,2268 3910.01,2285 3910.01,2360 3945.7,2395.7 U5.24@3945.67,2445.12 4067.41,2566.85 C63.2@4067.41,2615.24
  Bottom Layer w19.68: U12.4@3079.34,1852.8 3097.14,1835 3385,1835 3500,1950 3500,2080 3554.97,2134.97 C61.2@3554.96,2142.8
  Bottom Layer w23.62: U12.2@2845.48,1852.8 U12.4@3079.34,1852.8 3079.34,1958.31 C49.2@3067.41,1970.24
D+: R14.2 R21.1 ST-LINK.6 ST-LINK.8 | length 283.7
  Top Layer w10: ST-LINK.6@2388.95,1929.2 2388.95,2004.09 R21.1@2408.8,2023.94 R14.2@2468.8,2023.94 ; 2388.95,1979.89 2388.95,1976.25 2397.41,1967.8 ; ST-LINK.6@2388.95,1929.2 2389.01,1959.4 2397.41,1967.8 ; ST-LINK.8@2428.32,1929.2 2428.3,1956.9 2417.41,1967.8 2397.41,1967.8
D-: R20.1 ST-LINK.5 ST-LINK.7 | length 217
  Top Layer w10: R20.1@2348.8,2023.94 2369.26,2003.48 ST-LINK.5@2369.26,1929.2 2369.26,1895.94 2377.41,1887.8 2402.41,1887.8 2408.64,1894.03 ST-LINK.7@2408.64,1929.2
FCS: U1.2 W25Q256.1 | length 667.3
  Top Layer w10: W25Q256.1@3037.77,2282.84 2940.66,2379.94 2940.66,2616.05 2984.61,2660 3084.61,2660 3130.2,2705.6 U1.2@3130.21,2772.79
GBUF: AUDIO1.1 R38.1 U5.42 | length 408
  Top Layer w8: R38.1@3820.34,1875 3855.01,1909.66 v1(3855.01,1925)
  Top Layer w11.81: AUDIO1.1@3819.89,1745.01 3819.91,1755.1 3790.01,1785 3790.01,1844.7 R38.1@3820.34,1875
  Bottom Layer w10: U5.42@3847.25,2110.48 3847.2,2000.5 3855.01,1992.7 v1(3855.01,1925)